# Allegro board 100ask_imx6ull_lcd底板.brd
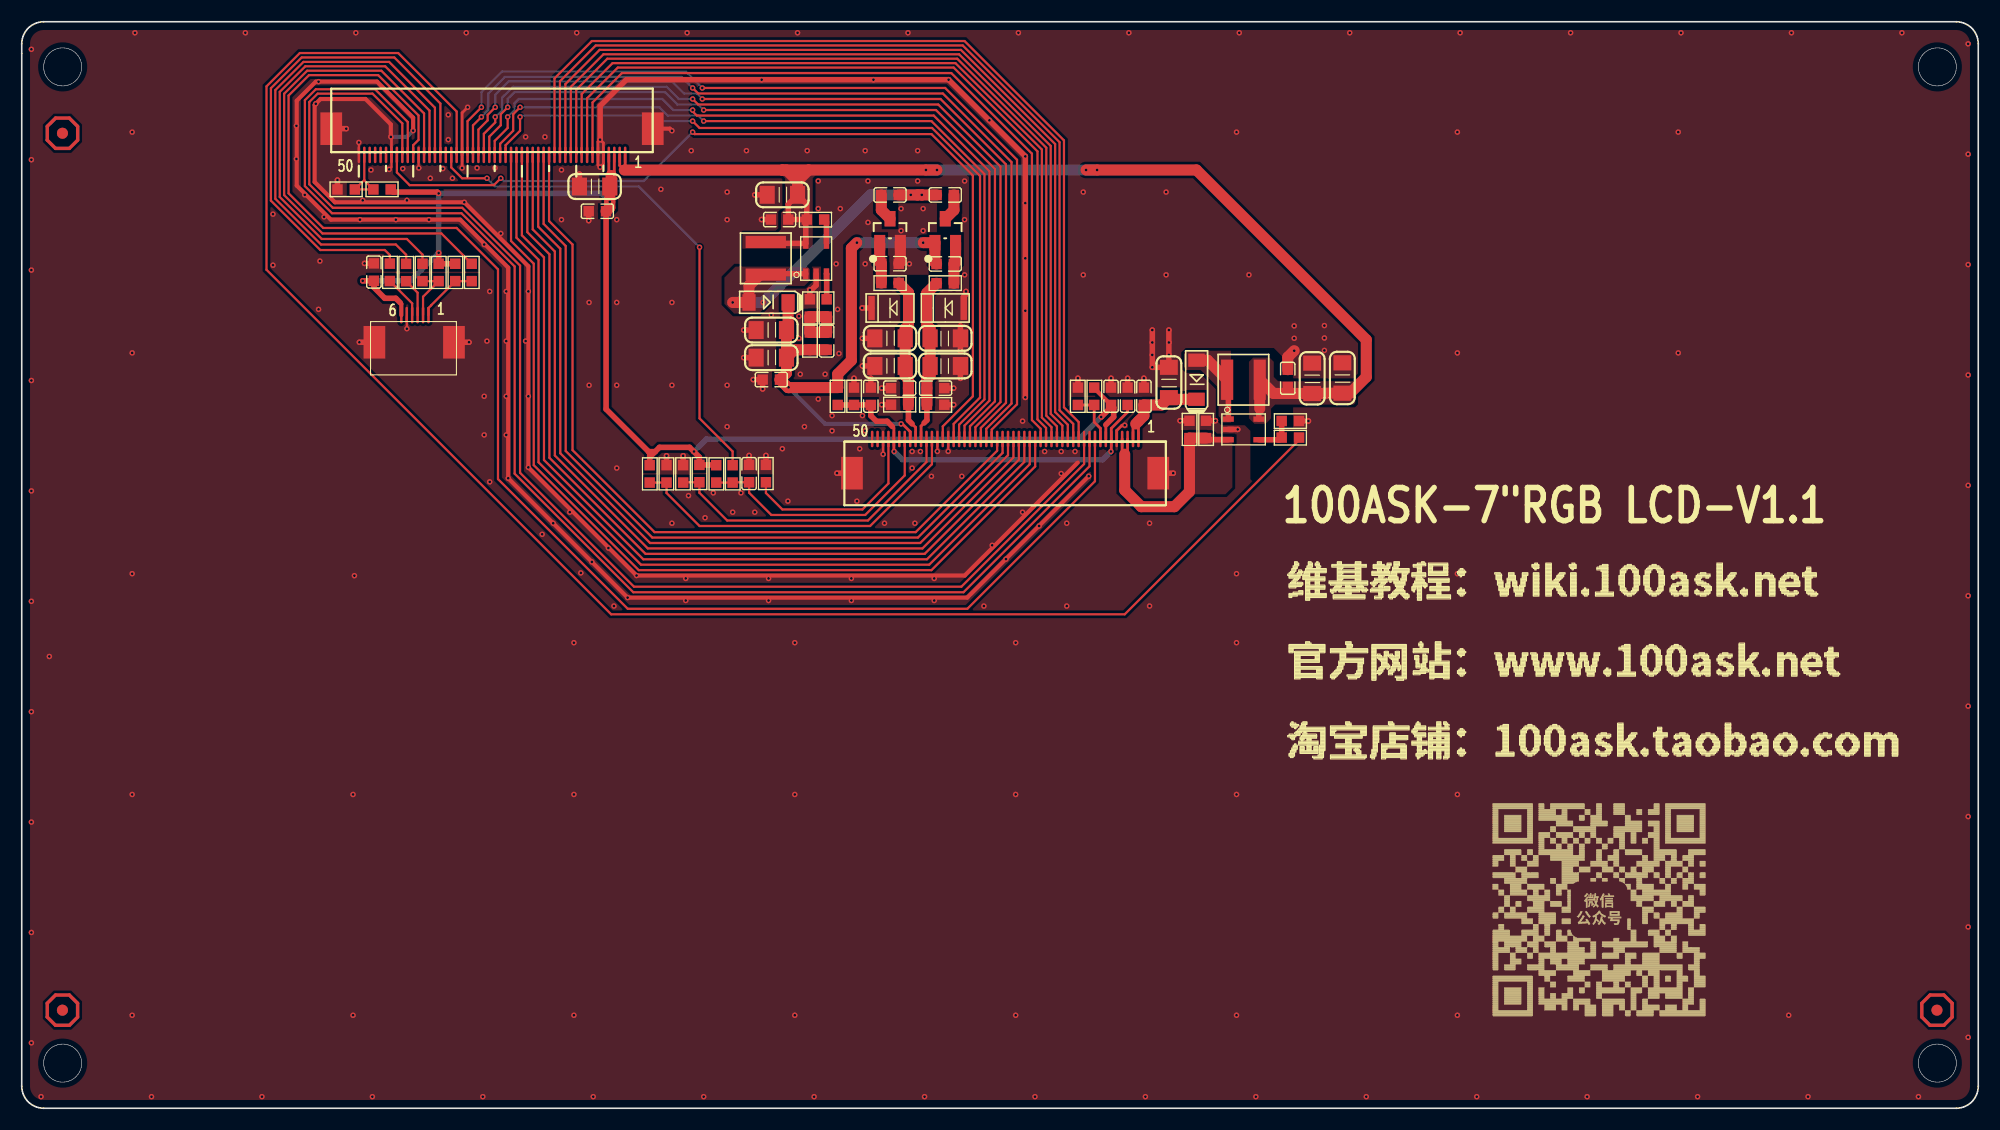
[diagram p0: board, top side]
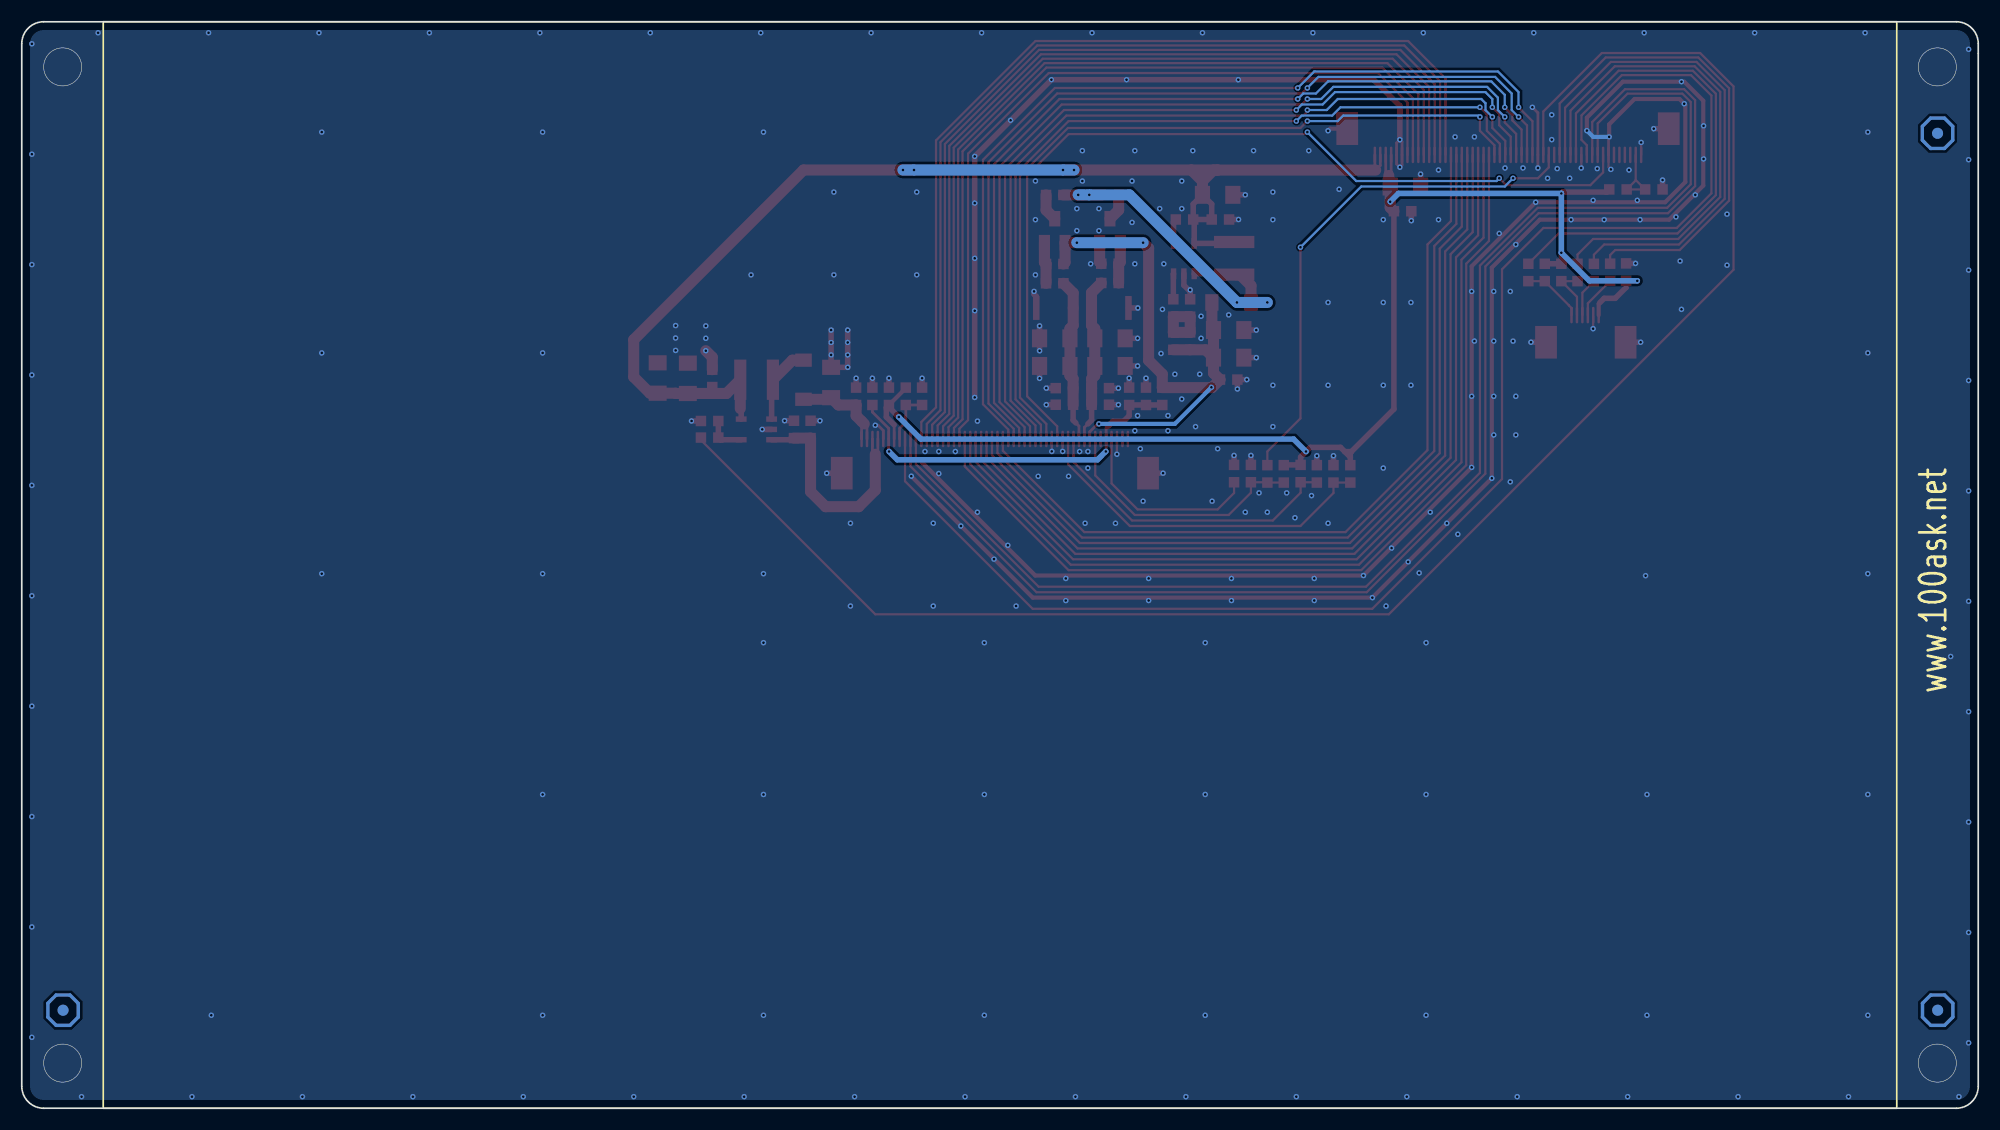
[diagram p1: board, bottom side, seen from below]

Outline 180 x 100 mm; copper layers: TOP, BOTTOM. Coordinates in mm from the lower left corner of the outline.
Outline path: circle c3.76,95.84 r1.75 ; circle c3.76,4.16 r1.75 ; circle c176.24,95.84 r1.75 ; circle c176.24,4.16 r1.75 ; 0,97.97 0,2.03 arc(0.6,0.6) 2.03,0 177.97,0 arc(179.4,0.6) 180,2.03 180,97.97 arc(179.4,99.4) 177.97,100 2.03,100 arc(0.6,99.4) 0,97.97

## Design rules (mm)
net group POWER: nets 3V3 VDDA VGH VGL VLED+

## Placement (name value [footprint] x y rotation side)
C1  NC/100nF/6/25V  [C0603]  84.96 77.71 0 top
C2  1uF/12/25V  [C1206]  84.96 70.86 0 top
C3  1uF/12/25V  [C1206]  84.96 68.32 0 top
C4  100nF/6/25V  [C0603]  84.07 66.28 180 top
C5  100nF/6/25V  [C0603]  84.96 84.06 0 top
C6  100nF/6/25V  [C0603]  79.88 84.06 180 top
C7  100nF/6/25V  [C0603]  79.88 77.73 180 top
C8  1uF/12/25V  [C1206]  79.88 70.86 180 top
C9  1uF/12/25V  [C1206]  79.88 68.32 180 top
C10  100nF/6/25V  [C0603]  80.77 66.28 0 top
C11  22pF/6/25V  [C0603]  74.05 70.61 90 top
C12  10uF/12/16V  [C1206]  68.96 69.08 180 top
C13  1uF/12/25V  [C1206]  68.96 71.62 180 top
C14  10uF/12/16V  [C1206]  69.98 84.07 180 top
C15  100nF/6/25V  [C0603]  69.72 81.8 180 top
C16  100nF/6/25V  [C0603]  101.74 65.53 90 top
C17  100nF/6/25V  [C0603]  78.12 65.53 90 top
C18  100nF/6/25V  [C0603]  66.92 58.41 270 top
C19  10uF/12/16V  [C1206]  118.72 67.18 90 top
C20  10uF/12/16V  [C1206]  121.5 67.21 90 top
C21  1uF/12/25V  [C1206]  105.54 66.8 90 top
C22  100nF/6/25V  [C0603]  52.96 82.56 180 top
C23  10uF/12/16V  [C1206]  52.71 84.83 180 top
C24  100nF/6/25V  [C0603]  103.24 65.53 270 top
C25  100nF/6/25V  [C0603]  68.96 67.06 180 top
C26  100nF/6/25V  [C0603]  100.22 65.53 90 top
C27  100nF/6/25V  [C0603]  32.4 76.96 90 top
C28  100nF/6/25V  [C0603]  116.47 67.18 90 top
D1  BAT54S/SOT  [SOT23]  84.96 80.77 0 top
D2  ZMM16V  [LL-34]  84.96 73.65 180 top
D3  BAT54S/SOT  [SOT23]  79.88 80.77 0 top
D4  ZMM7V5  [LL-34]  79.88 73.65 180 top
D5  IN5819  [SOD123]  68.71 74.16 180 top
D6  IN5819  [SOD123]  108.08 67.05 90 top
J1  LCD_FPC_50P  [FPC50_0A5_SM_H1]  55.51 87.75 0 top
J2  FPC50_LCD_MOD  [FPC50_0A5_SM_H]  90.47 61.36 0 top
J3  TP_FPC_6P  [FPC6_0A5_SM_H]  36.11 74.02 180 top
L1  10uH/4X4X2.0  [IND_4020]  68.45 78.23 270 top
L2  4.7uH/4X4X2.0  [IND_4020]  112.4 67.05 180 top
NOREF  -  [unnamed]  3.75 9.03 0 top
NOREF#2  -  [unnamed]  3.75 89.74 0 top
NOREF#3  -  [unnamed]  176.2 9.03 0 top
NOREF#4  -  [unnamed]  176.2 9.02 180 bottom
NOREF#5  -  [unnamed]  3.73 9.02 180 bottom
NOREF#6  -  [unnamed]  3.75 89.73 180 bottom
R1  1.4K/6/1%  [R0603]  84.96 75.93 0 top
R2  NC_4.7K/6/1%  [R0603]  84.07 64.75 180 top
R3  NC  [R0603]  98.67 65.53 270 top
R4  4.7K/6/1%  [R0603]  97.17 65.53 90 top
R5  2.2K/6/1%  [R0603]  79.88 75.95 180 top
R6  NC_4.7K/6/1%  [R0603]  80.77 64.75 0 top
R7  0R  [R0603]  57.77 58.39 270 top
R8  0R  [R0603]  62.34 58.41 270 top
R9  10K  [R0603]  63.89 58.39 270 top
R10  0R  [R0603]  65.4 58.39 270 top
R11  100K/6/1%  [R0603]  72.5 70.61 270 top
R12  10K/6/1%  [R0603]  73.03 81.8 180 top
R13  100K/6/1%  [R0603]  74.05 73.65 90 top
R14  13K/6/1%  [R0603]  72.5 73.65 270 top
R15  10K  [R0603]  75.07 65.53 90 top
R16  NC  [R0603]  59.32 58.39 90 top
R17  NC  [R0603]  60.85 58.39 90 top
R18  4.7K  [R0603]  76.57 65.53 270 top
R19  4.7K  [R0603]  68.47 58.41 90 top
R20  4.7K/6/1%  [R0603]  38.36 76.92 270 top
R21  1K/6/5%  [R0603]  33.15 84.56 0 top
R22  4.7K/6/1%  [R0603]  39.88 76.92 270 top
R23  20R/6/1%  [R0603]  41.4 76.92 270 top
R24  20R/6/1%  [R0603]  36.87 76.92 270 top
R25  20R/6/1%  [R0603]  35.36 76.92 270 top
R26  20R/6/1%  [R0603]  33.87 76.93 270 top
R27  10K/6/1%  [R0603]  29.85 84.56 0 top
R28  10K/6/1%  [R0603]  116.71 61.73 180 top
R29  47K/6/1%  [R0603]  116.71 63.25 180 top
R30  3R/6/1%  [R0603]  108.95 62.48 270 top
R31  3R/6/1%  [R0603]  107.43 62.48 270 top
U1  MP1541  [SOT23-5]  73.08 78.2 0 top
U3  MP3302  [SOT23-5]  112.41 62.48 270 top

## Library data of the parts
C1 C4-C7 C10 C11 C15-C18 C22 C24-C28 = CAP NP
C2 C3 C8 C9 C12-C14 C19-C21 C23 = CERAMIC CAPACITOR: Tolerance: #TOL; User Part Number: HAMP
D1 = BAT54S/SOT_2: User Part Number: *; Tolerance: *
D2 = ZHCS1000/SOT_3
D3 = BAT54S/SOT_1: User Part Number: *; Tolerance: *
D4 = ZHCS1000/SOT_2
D5 D6 = General Diode
J1 = LCD_FPC_3
J2 = FPC50_LCD_MOD_2
J3 = FPC_1.5MM-6P
L1 L2 = Inductor
R1-R20 R22-R31 = R1_0805
R21 = R1 0805
U1 = MP1541
U3 = MP3302

## Footprints (pads in the part's own frame, mm; a bottom-side part is the same pattern mirrored in y, then rotated)
C0603
  rect 0.965x0.965 smd: 1(-0.8,0) 2(0.8,0)
C1206
  rect 1.397x1.651 smd: 1(-1.397,0) 2(1.397,0)
FPC6_0A5_SM_H
  oval 0.229x1.524 smd: 1(-1.315,1.02) 2(-0.815,1.02) 3(-0.315,1.02) 4(0.185,1.02) 5(0.685,1.02) 6(1.185,1.02)
  rect 2x3 smd: 7(3.66,3.52) 8(-3.66,3.52)
FPC50_0A5_SM_H
  oval 0.229x1.524 smd: 1(12.267,0.242) 2(11.767,0.242) 3(11.267,0.242) 4(10.767,0.242) 5(10.267,0.242) 6(9.767,0.242) 7(9.267,0.242) 8(8.767,0.242) 9(8.267,0.242) 10(7.767,0.242) 11(7.267,0.242) 12(6.767,0.242) 13(6.267,0.242) 14(5.767,0.242) 15(5.267,0.242) 16(4.767,0.242) 17(4.267,0.242) 18(3.767,0.242) 19(3.267,0.242) 20(2.767,0.242) 21(2.267,0.242) 22(1.767,0.242) 23(1.267,0.242) 24(0.767,0.242) 25(0.267,0.242) 26(-0.233,0.242) 27(-0.733,0.242) 28(-1.233,0.242) 29(-1.733,0.242) 30(-2.233,0.242) 31(-2.733,0.242) 32(-3.233,0.242) 33(-3.733,0.242) 34(-4.233,0.242) 35(-4.733,0.242) 36(-5.233,0.242) 37(-5.733,0.242) 38(-6.233,0.242) 39(-6.733,0.242) 40(-7.233,0.242) 41(-7.733,0.242) 42(-8.233,0.242) 43(-8.733,0.242) 44(-9.233,0.242) 45(-9.733,0.242) 46(-10.233,0.242) 47(-10.733,0.242) 48(-11.233,0.242) 49(-11.733,0.242) 50(-12.233,0.242)
  rect 2x3 smd: 51(14.09,-2.908) 52(-14.09,-2.908)
FPC50_0A5_SM_H1
  oval 0.229x1.524 smd: 1(0,0) 2(-0.5,0) 3(-1,0) 4(-1.5,0) 5(-2,0) 6(-2.5,0) 7(-3,0) 8(-3.5,0) 9(-4,0) 10(-4.5,0) 11(-5,0) 12(-5.5,0) 13(-6,0) 14(-6.5,0) 15(-7,0) 16(-7.5,0) 17(-8,0) 18(-8.5,0) 19(-9,0) 20(-9.5,0) 21(-10,0) 22(-10.5,0) 23(-11,0) 24(-11.5,0) 25(-12,0) 26(-12.5,0) 27(-13,0) 28(-13.5,0) 29(-14,0) 30(-14.5,0) 31(-15,0) 32(-15.5,0) 33(-16,0) 34(-16.5,0) 35(-17,0) 36(-17.5,0) 37(-18,0) 38(-18.5,0) 39(-19,0) 40(-19.5,0) 41(-20,0) 42(-20.5,0) 43(-21,0) 44(-21.5,0) 45(-22,0) 46(-22.5,0) 47(-23,0) 48(-23.5,0) 49(-24,0) 50(-24.5,0)
  rect 2x3 smd: 51(-27.04,2.413) 52(2.54,2.413)
IND_4020
  rect 1.118x3.708 smd: 1(-1.5,0) 2(1.5,0)
LL-34
  rect 0.6x2.2 smd: 1(-1.7,0) 2(1.7,0)
R0603
  rect 0.965x0.965 smd: 1(-0.8,0) 2(0.8,0)
SOD123
  rect 1.219x1.524 smd: 1(1.8,0) 2(-1.8,0)
SOT23
  rect 1.016x1.422 smd: 1(-0.95,-1.1) 2(0.95,-1.1) 3(0,1.1)
SOT23-5
  rect 0.5x1 smd: 1(-0.95,-1.4) 2(0,-1.4) 3(0.95,-1.4) 4(0.95,1.4) 5(-0.95,1.4)
unnamed
  round 1.016 smd: 1(0,0)

## Nets
3V3: C22.1 C23.1 C26.1 C27.1 J1.3(3V3) J1.4(3V3_1) J2.7(VDD) J3.6(VCC) R3.1 R7.1 R8.1 R9.1 R20.1 R21.2 R22.1
5V: C14.1 C15.1 C19.1 C20.1 C28.1 J1.1(5V) J1.2(5V_1) L1.1 L2.1 R12.2 U1.5(VIN) U3.5(VIN)
GND_POWER: C2.2 C3.2 C4.1 C7.1 C8.2 C9.2 C10.1 C12.2 C13.2 C14.2 C15.2 C16.2 C17.2 C18.1 C19.2 C20.2 C21.2 C22.2 C23.2 C24.1 C25.2 C26.2 C27.2 C28.2 D2.1(CATHODE) D3.2 D4.2(ANODE) J1.5(GND0) J1.6(GND1) J1.31(GND2) J1.39(GND3) J1.44(GND4) J1.50(GND5) J1.51(SH1) J1.52(SH2) J2.5(GND_1) J2.36(GND_2) J2.38(GND_3) J2.48(GND_4) J2.51(SH1) J2.52(SH2) J3.5(GND) J3.7(SH1) J3.8(SH2) R2.1 R4.2 R6.1 R14.1 R16.2 R17.2 R18.1 R19.2 R27.1 R29.1 R30.1 R31.1 U1.2(GND) U3.2(GND)
VDDA: C1.1 C11.1 C12.1 C13.1 C25.1 D1.1 D5.2 J2.43(VDDA) R11.2 R15.2
B0: J1.7(B0) J2.19(B0)
B1: J1.8(B1) J2.18(B1)
B2: J1.9(B2) J2.17(B2)
B3: J1.10(B3) J2.16(B3)
B4: J1.11(B4) J2.15(B4)
B5: J1.12(B5) J2.14(B5)
B6: J1.13(B6) J2.13(B6)
B7: J1.14(B7) J2.12(B7)
BL_CN: J1.32(BL_CN) R28.1
DE: J1.40(DEN) J2.9(DE)
G0: J1.15(G0) J2.27(G0)
G1: J1.16(G1) J2.26(G1)
G2: J1.17(G2) J2.25(G2)
G3: J1.18(G3) J2.24(G3)
G4: J1.19(G4) J2.23(G4)
G5: J1.20(G5) J2.22(G5)
G6: J1.21(G6) J2.21(G6)
G7: J1.22(G7) J2.20(G7)
HS: J1.42(HSYNC) J2.11(HSYNC)
LCD_ID: J1.49(LR/ADC_LCD_ID) R21.1 R27.2
PCLK: J1.43(PCLK) J2.37(CLK)
R0: J1.23(R0) J2.35(R0)
R1: J1.24(R1) J2.34(R1)
R2: J1.25(R2) J2.33(R2)
R3: J1.26(R3) J2.32(R3)
R4: J1.27(R4) J2.31(R4)
R5: J1.28(R5) J2.30(R5)
R6: J1.29(R6) J2.29(R6)
R7: J1.30(R7) J2.28(R7)
RST: J1.33(RESET) R10.1
TP_INT: J1.35(TP_INTN) R26.1
TP_RST: J1.36(TP_RESET) R25.1
TP_SCL: J1.37(TP_SCL) R24.1
TP_SDA: J1.38(TP_SDA) R23.1
VGH: C2.1 C3.1 C4.2 D2.2(ANODE) J2.41(VGH) R1.1 R2.2
VGL: C8.1 C9.1 C10.2 D4.1(CATHODE) J2.42(VGL) R5.1 R6.2
VLED+: C21.1 C24.2 D6.2 J2.1(LED+_1) J2.2(LED+_2)
VLED-: J2.3(LED-_1) J2.4(LED-_2) R30.2 R31.2 U3.3(FB)
VS: J1.41(VSYNC) J2.10(VSYNC)
N16662620: D6.1 L2.2 U3.1(SW)
N16662628: J2.47(DITHER) R19.1
N16662982: R28.2 R29.2 U3.4(EN)
N16663078: C16.1 C17.1 J2.6(VCOM1) J2.46(VCOM2) R15.1 R18.2
N16663526: J3.1(SDA) R22.2 R23.2
N16663546: J3.2(SCL) R20.2 R24.2
N16663566: J3.3(RST) R25.2
N16663598: J3.4(INT) R26.2
N16663626: J2.8(MODE) R3.2 R4.1
N16663658: J2.40(UPDN) R8.2 R17.1
N16663662: J2.39(SHLR) R7.2 R16.1
N16663942: C18.2 J2.44(RESET) R9.2 R10.2
N16663986: C5.1 C6.1 D5.1 L1.2 U1.1(SW)
N16664260: C11.2 R11.1 R13.1 R14.2
N16664552: R13.2 U1.3(FB)
N16664760: C6.2 D3.3
N16664764: C5.2 D1.3
N16664892: C1.2 D1.2 R1.2
N16665094: C7.2 D3.1 R5.2
N16692155: R12.1 U1.4(\\S\H\D\N)

Pads without a net: J1 34 45 46 47 48; J2 45 49 50; NOREF 1; NOREF#2 1; NOREF#3 1; NOREF#4 1; NOREF#5 1; NOREF#6 1

## Via types
v1: diameter 0.508, hole 0.254, TOP to BOTTOM, 352 vias

## Routing (per net, layer and track width the routed paths; a pad name or vN(x,y) marks a point on that pad's centre or on a via; arc(x,y) is an arc through that point)
3V3: length 131.8
  TOP w0.254: 54.23,84.96 54.51,85.24 54.51,86.13 ; C23.1 54.01,84.92 54.01,86.19 ; 54.01,86.19 J1.4 ; 54.01,86.19 54.29,85.91 54.51,86.13 ; J2.7 99.74,62.9 ; 54.51,86.13 J1.3
  TOP w0.381: R3.1 98.67,66.28 C26.1 ; 34.82,74.14 34.92,74.04 J3.6
  TOP w0.508: 34.82,74.14 34.42,74.54 33.4,74.54 32.4,75.55 C27.1 v1(31.37,76.16) ; 99.74,62.9 100.46,63.62 100.46,64.49 C26.1 100.22,64.52 v1(99.31,63.62) ; 57.67,60.43 58.28,60.43 ; 57.67,60.43 53.76,64.35 C22.1 ; 57.67,60.43 57.77,60.33 57.77,59.93 ; 58.28,60.43 58.67,60.83 61.44,60.83 61.84,60.43 ; 58.28,60.43 57.77,59.93 ; R9.1 63.87,59.22 R8.1 62.34,59.93 61.84,60.43 ; R21.2 34.19,84.32 38.23,84.32 v1(38.36,84.19) ; 57.77,59.93 R7.1 ; v1(61.85,60.45) 61.84,60.43 ; v1(38.36,78.74) R20.1 R22.1
  TOP w1.016: C22.1 54.1,82.9 v1(54.1,83.43) C23.1 54.23,84.96 54.23,85.85
  BOTTOM w0.508: v1(54.1,83.43) 53.34,84.2 38.36,84.2 v1(38.36,84.19) v1(38.36,78.74) 35.78,76.16 v1(31.37,76.16) ; v1(61.85,60.45) 62.99,61.59 97.28,61.59 v1(99.31,63.62)
5V: length 117.8
  TOP w0.254: 55.25,86.54 55.01,86.77 J1.2 ; 55.25,86.54 55.51,86.8 J1.1 ; 55.25,86.54 55.44,86.35
  TOP w0.508: U3.5 113.81,66.97 L2.1 ; R12.2 C15.1 70.52,83.22 C14.1 72.22,83.22 R12.2 ; R12.2 72.13,81.7 U1.5 68.58,79.6 L1.1
  TOP w1.016: v1(84.2,86.35) v1(83.19,86.35) 72.4,86.35 ; 69.98,86.35 69.99,86.35 72.4,86.35 ; 69.98,86.35 55.44,86.35 ; 69.98,86.35 70.36,86.35 71.37,85.33 ; 72.4,86.35 71.37,85.33 ; 71.37,85.33 C14.1 ; 113.9,64.4 L2.1 115.16,65.79 C19.1 119.82,65.79 119.84,65.81 C20.1 122.2,65.81 123.7,67.3 123.7,70.73 108.08,86.35 v1(98.93,86.35) v1(97.92,86.35)
  BOTTOM w1.016: v1(83.19,86.35) v1(84.2,86.35) v1(97.92,86.35) v1(98.93,86.35)
GND_POWER: length 394.2
  TOP w0.203: v1(31.01,88.89) J1.50 ; v1(85.24,60.46) J2.36 ; J1.44 34.01,86.62 v1(33.8,86.41) ; v1(84.24,60.46) J2.38 ; J1.39 36.51,86.55 ; v1(35.43,71.75) 35.43,72.89 ; v1(79.25,60.19) 79.25,61.34
  TOP w0.254: J2.5 100.74,62.38 101.22,62.86 v1(101.47,62.86) ; J1.44 34.01,89.35 ; v1(41.02,92.13) 40.51,91.62 J1.31 v1(40.51,86.54) ; J1.5 53.51,86.91 v1(53.21,86.61) 53.01,86.81 J1.6 53.01,88.95 v1(53.21,89.15) 53.51,88.85 J1.5
  TOP w0.381: v1(36.01,89.98) 36.01,91.17 32.7,94.48 v1(27.31,94.48) 27.05,94.48 25.3,92.73 25.3,84.92 28.44,81.78 40.34,81.78 44.75,77.37 v1(44.75,57.98) v1(55.74,47) 86.98,47 v1(98.16,58.17) ; 97.16,59.43 86.75,49.03 v1(56.56,49.03) v1(46.61,58.98) v1(46.61,65.53) v1(46.61,75.18) 46.61,77.49 v1(40.72,83.38) 28.81,83.38 26.95,85.25 26.95,92.35 v1(27.05,92.45) 27.49,92.89 31.62,92.89 33.96,90.55 v1(33.96,89.4) 34.01,89.35 ; 36.51,86.55 v1(36.53,86.54) ; v1(59.82,89.97) 59.63,90.16 J1.52
  TOP w0.508: v1(104.01,71.62) v1(104.01,70.48) v1(104.01,69.34) v1(104.01,68.19) C21.2 v1(105.54,69.34) v1(105.54,70.48) v1(105.54,71.62) ; D2.1 86.66,74.72 86.87,74.92 v1(86.87,75.18) ; v1(67.3,67.06) C25.2 v1(68.16,66.2) ; J2.51 v1(105.94,58.45) ; v1(92.33,65.43) v1(92.33,87.6) v1(85.27,94.67) v1(78.36,94.67) v1(68.07,94.67) 55.63,94.67 53.21,92.25 v1(53.21,89.15) ; C3.2 v1(86.36,67.18) ; D4.2 v1(77.32,73.65) ; C9.2 v1(77.34,68.32) ; J3.8 v1(41.15,70.5) ; C10.1 v1(79.11,66.28) ; R17.2 v1(60.85,60.05) ; U1.2 73.08,75.74 72.5,75.17 ; R27.1 v1(29.04,85.43) ; C26.2 v1(100.22,67.19) ; v1(86.36,69.72) C2.2 v1(86.36,72) ; J1.51 v1(29.85,90.16) ; C24.1 v1(103.24,67.19) ; R30.1 v1(109.82,63.28) ; J3.7 v1(31.06,70.5) ; R2.1 v1(85.74,64.75) ; R31.1 v1(106.57,63.28) ; C13.2 v1(66.42,71.62) ; C23.2 v1(51.31,85.97) ; C8.2 v1(77.34,70.86) ; C14.2 v1(67.44,84.07) ; R4.2 v1(97.17,67.19) ; C22.2 v1(52.16,81.69) ; C18.1 v1(66.92,60.08) ; C16.2 v1(101.74,67.19) ; C12.2 v1(66.42,69.08) ; R18.1 v1(76.57,67.19) ; C4.1 v1(85.74,66.28) ; C27.2 v1(31.53,77.76) ; C15.2 v1(68.06,81.8) ; R14.1 72.5,75.17 ; 72.5,75.17 v1(72.5,75.32) ; C17.2 v1(78.12,67.19) ; R6.1 v1(79.11,64.75) ; R29.1 v1(118.38,63.25) ; R19.2 v1(68.47,60.08) ; U3.2 v1(111.87,62.48) ; J2.52 v1(75,58.45) ; R16.2 v1(59.32,60.05)
  TOP w1.016: v1(117.07,69.72) 116.47,69.13 C28.2 ; D3.2 80.83,77.88 C7.1
  BOTTOM w0.381: v1(33.96,89.4) 35.43,89.4 v1(36.01,89.98)
  vias: v1(0.89,97.46) v1(0.89,87.3) v1(0.89,77.14) v1(0.89,66.98) v1(0.89,56.82) v1(0.89,46.66) v1(0.89,36.5) v1(0.89,26.34) v1(0.89,16.18) v1(0.89,6.02) v1(1.78,1.07) v1(2.54,41.58) v1(10.16,89.84) v1(10.16,69.52) v1(10.16,49.2) v1(10.16,28.88) v1(10.16,8.56) v1(10.41,98.98) v1(11.94,1.07) v1(20.57,98.98) v1(22.1,1.07) v1(23.11,82.29) v1(23.11,77.59) v1(25.27,90.42) v1(25.27,87.37) v1(26.04,84.07) v1(27.31,73.53) v1(27.43,77.97) v1(27.81,82.04) v1(30.48,28.88) v1(30.48,8.56) v1(30.61,49.02) v1(30.73,98.98) v1(31.12,81.78) v1(31.37,83.56) v1(32.13,86.35) v1(32.26,1.07) v1(34.42,81.78) v1(35.05,86.48) v1(35.43,83.56) v1(37.47,81.78) v1(37.59,85.59) v1(38.74,86.48) v1(39.24,91.43) v1(39.24,89.15) v1(39.62,85.59) v1(40.89,98.98) v1(41.89,86.54) v1(42.42,1.07) v1(42.55,79.5) v1(42.55,65.53) v1(42.55,61.97) v1(42.8,70.61) v1(43.05,75.18) v1(43.05,57.65) v1(43.54,86.54) v1(44.07,80.51) v1(44.58,75.18) v1(44.58,70.61) v1(44.58,65.53) v1(44.58,61.97) v1(46.36,89.4) v1(46.36,70.61) v1(47.88,52.83) v1(48.13,89.4) v1(48.9,53.84) v1(49.66,86.35) v1(49.66,81.78) v1(50.42,54.86) v1(50.8,42.85) v1(50.8,28.88) v1(50.8,8.56) v1(51.05,98.98) v1(51.44,49.27) v1(52.2,74.16) v1(52.2,66.54) v1(52.45,50.29) v1(52.58,1.07) v1(53.98,51.56) v1(54.48,46.22) v1(54.74,81.78) v1(54.74,74.16) v1(54.74,66.54) v1(54.74,58.92) v1(58.8,84.58) v1(59.82,74.16) v1(59.82,66.54) v1(59.82,53.84) v1(61.09,48.76) v1(61.09,46.73) v1(61.21,98.98) v1(61.34,56.38) v1(61.6,88.13) v1(62.74,1.07) v1(62.87,54.35) v1(63.63,56.64) v1(64.9,84.32) v1(64.9,81.78) v1(64.9,66.54) v1(64.9,62.73) v1(65.41,54.86) v1(66.17,56.64) v1(66.68,88.13) v1(67.44,54.86) v1(68.71,48.76) v1(68.71,46.73) v1(68.96,73.02) v1(69.98,60.7) v1(70.49,55.87) v1(71.12,42.85) v1(71.12,28.88) v1(71.12,8.56) v1(71.37,98.98) v1(71.5,72.89) v1(71.5,70.86) v1(71.63,67.56) v1(72.01,62.73) v1(72.26,88.13) v1(72.9,1.07) v1(73.28,85.34) v1(73.28,82.8) v1(73.28,65.27) v1(73.91,67.56) v1(74.55,63.75) v1(74.55,62.35) v1(74.93,77.72) v1(75.06,73.53) v1(75.18,69.46) v1(75.31,82.8) v1(76.33,48.76) v1(76.33,46.73) v1(76.84,55.87) v1(77.09,60.7) v1(77.34,63.75) v1(77.6,88.13) v1(77.6,77.72) v1(77.6,62.35) v1(77.85,85.34) v1(77.85,81.53) v1(79.38,53.84) v1(80.9,82.8) v1(80.9,80.77) v1(81.53,98.98) v1(81.66,77.72) v1(81.92,60.45) v1(81.92,58.92) v1(82.17,53.84) v1(82.42,88.13) v1(82.42,85.34) v1(82.68,60.45) v1(82.93,82.8) v1(82.93,80.77) v1(83.06,1.07) v1(83.69,58.16) v1(83.95,48.76) v1(83.95,46.73) v1(86.49,58.16) v1(86.74,85.34) v1(86.74,81.78) v1(86.74,76.7) v1(88.52,46.22) v1(89.03,90.93) v1(89.28,51.81) v1(90.55,50.54) v1(91.44,42.85) v1(91.44,28.88) v1(91.44,8.56) v1(91.69,98.98) v1(92.08,63.24) v1(92.08,54.86) v1(92.33,83.31) v1(92.33,78.23) v1(92.33,73.4) v1(93.22,1.07) v1(93.6,53.59) v1(94.11,60.45) v1(95.63,60.45) v1(95.63,58.41) v1(96.14,53.84) v1(96.14,46.22) v1(96.9,60.45) v1(97.66,84.32) v1(97.66,76.7) v1(101.85,98.98) v1(103.38,1.07) v1(103.76,53.84) v1(103.76,46.22) v1(105.28,84.32) v1(105.28,76.7) v1(111.76,89.84) v1(111.76,49.2) v1(111.76,42.85) v1(111.76,28.88) v1(111.76,8.56) v1(112.01,98.98) v1(112.9,76.7) v1(113.54,1.07) v1(117.07,72.01) v1(117.07,70.87) v1(119.84,72.03) v1(119.84,70.89) v1(119.84,69.75) v1(122.17,98.98) v1(123.7,1.07) v1(132.08,89.84) v1(132.08,69.52) v1(132.08,49.2) v1(132.08,28.88) v1(132.08,8.56) v1(132.33,98.98) v1(133.86,1.07) v1(142.49,98.98) v1(144.02,1.07) v1(152.4,89.84) v1(152.4,69.52) v1(152.4,49.2) v1(152.65,98.98) v1(154.18,1.07) v1(162.56,8.56) v1(162.81,98.98) v1(164.34,1.07) v1(172.97,98.98) v1(174.5,1.07) v1(179.07,97.97) v1(179.07,87.81) v1(179.07,77.65) v1(179.07,67.49) v1(179.07,57.33) v1(179.07,47.17) v1(179.07,37.01) v1(179.07,26.85) v1(179.07,16.69) v1(179.07,6.53)
VDDA: length 53.9
  TOP w0.254: v1(80.9,62.99) 81.02,62.99 81.74,62.27 J2.43
  TOP w1.016: 70.57,66.33 v1(70.55,66.35) ; 70.57,66.33 70.5,66.33 C25.1 70.36,67.66 C12.1 ; 70.57,66.33 R15.2 75.07,67.57 76.33,68.83 76.33,79.16 v1(76.84,79.67) ; C12.1 71.08,69.81 R11.2 C11.1 ; C12.1 C13.1 70.51,71.77 D5.2 ; v1(82.93,79.67) D1.1 84.01,77.86 C1.1
  BOTTOM w0.381: v1(70.55,66.35) 73.91,62.99 v1(80.9,62.99)
  BOTTOM w1.016: v1(82.93,79.67) v1(76.84,79.67)
B0: length 76
  TOP w0.203: J2.19 93.74,62.54 92.94,63.34 92.94,87.86 85.52,95.28 55.22,95.28 52.51,92.57 J1.7
B1: length 77.8
  TOP w0.203: J1.8 52.01,92.96 54.84,95.78 85.73,95.78 93.45,88.07 93.45,63.4 94.24,62.61 J2.18
B2: length 79.4
  TOP w0.203: J1.9 51.51,93.35 54.36,96.19 85.9,96.19 93.85,88.24 93.85,63.57 94.74,62.69 J2.17
B3: length 81
  TOP w0.203: J1.10 51.01,93.74 53.87,96.6 86.07,96.6 94.26,88.4 94.26,63.74 95.24,62.76 J2.16
B4: length 82.6
  TOP w0.203: J2.15 95.74,62.84 94.67,63.91 94.67,88.57 86.24,97 53.52,97 50.51,94 J1.11
B5: length 84.1
  TOP w0.203: J2.14 96.24,62.91 95.07,64.08 95.07,88.74 86.4,97.41 53.16,97.41 50.01,94.26 J1.12
B6: length 85.6
  TOP w0.203: J1.13 49.51,94.52 52.81,97.82 86.57,97.82 95.48,88.91 95.48,64.25 96.74,62.99 J2.13
B7: length 87.2
  TOP w0.203: J1.14 49.01,94.78 52.45,98.22 86.74,98.22 95.88,89.08 95.88,64.51 97.24,63.16 J2.12
BL_CN: length 156.9
  TOP w0.203: J1.32 40.01,91.74 34.63,97.12 25.58,97.12 22.52,94.05 22.52,77.17 54.23,45.46 101.47,45.46 117.51,61.5 R28.1
DE: length 137.2
  TOP w0.203: J1.40 36.01,88.64 36.5,89.13 36.5,91.37 32.79,95.09 26.43,95.09 24.55,93.21 24.55,84.21 27.74,81.02 40.01,81.02 43.81,77.21 43.81,57.91 55.75,45.97 87,45.97 98.74,57.71 J2.9
G0: length 74.4
  TOP w0.203: J2.27 89.74,60.52 82.24,53.02 58.22,53.02 50.67,60.57 50.67,79.5 48.51,81.66 J1.15
G1: length 76.1
  TOP w0.203: J2.26 90.24,60.31 82.45,52.52 58.01,52.52 50.05,60.49 50.05,79.36 48.01,81.39 J1.16
G2: length 77.8
  TOP w0.203: J1.17 47.51,81.14 49.55,79.11 49.55,60.28 57.8,52.02 82.66,52.02 90.74,60.1 J2.25
G3: length 79.4
  TOP w0.203: J2.24 91.24,59.9 82.86,51.52 57.6,51.52 49.05,60.08 49.05,78.86 47.01,80.89 J1.18
G4: length 81.1
  TOP w0.203: J1.19 46.51,80.63 48.55,78.6 48.55,59.87 57.39,51.02 83.07,51.02 91.74,59.69 J2.23
G5: length 82.7
  TOP w0.203: J2.22 92.24,59.48 83.28,50.52 57.18,50.52 48.05,59.66 48.05,78.31 46.01,80.35 J1.20
G6: length 84.4
  TOP w0.203: J1.21 45.51,80.13 47.55,78.09 47.55,59.46 56.98,50.02 83.49,50.02 92.74,59.28 J2.21
G7: length 86
  TOP w0.203: J1.22 45.01,79.82 47.1,77.73 47.1,59.19 56.77,49.52 83.69,49.52 93.24,59.07 J2.20
HS: length 125.3
  TOP w0.203: J1.42 35.01,90.64 32.27,93.38 27.23,93.38 26.45,92.61 26.45,85.04 28.62,82.88 40.52,82.88 45.85,77.55 45.85,58.48 56.33,48 86.44,48 97.74,59.29 J2.11
LCD_ID: length 6.5
  TOP w0.203: 31.51,85.43 R27.2 R21.1 31.51,85.4 31.51,85.43 ; 31.51,85.43 J1.49
PCLK: length 84.4
  TOP w0.203: v1(44.07,85.59) 43.43,84.96 35.69,84.96 34.51,86.13 J1.43 ; v1(61.72,89.84) 61.91,89.66 83.69,89.66 87.5,85.85 87.5,65.53 84.74,62.76 J2.37
  BOTTOM w0.203: v1(61.72,89.84) 57.22,85.34 44.32,85.34 v1(44.07,85.59)
R0: length 73.9
  TOP w0.203: J2.35 85.74,62.99 88.16,65.41 88.16,85.81 83.75,90.22 62.36,90.22 v1(61.72,90.86) ; v1(45.85,91.24) 45.85,89.97 44.51,88.63 J1.23
  BOTTOM w0.203: v1(45.85,91.24) 45.97,91.36 58.42,91.36 58.93,90.86 v1(61.72,90.86)
R1: length 75.8
  TOP w0.203: J1.24 44.01,88.77 45.21,89.97 45.21,91.49 v1(45.85,92.13) ; J2.34 86.24,62.91 88.57,65.25 88.57,85.98 83.69,90.86 v1(62.74,90.86)
  BOTTOM w0.203: v1(45.85,92.13) 58.67,92.13 59.44,91.36 62.23,91.36 v1(62.74,90.86)
R2: length 77.8
  TOP w0.203: v1(44.7,91.24) 44.7,90.22 43.51,89.03 J1.25 ; J2.33 86.74,62.84 89.03,65.13 89.03,86.24 83.9,91.36 62.1,91.36 61.72,91.75 v1(61.72,91.87)
  BOTTOM w0.203: v1(61.72,91.87) 59.94,91.87 58.93,92.89 45.72,92.89 45.34,92.51 45.34,91.87 v1(44.7,91.24)
R3: length 79.7
  TOP w0.203: v1(44.7,92.13) 44.07,91.49 44.07,90.48 43.01,89.42 J1.26 ; J2.32 87.24,62.76 89.54,65.06 89.54,86.45 84.11,91.87 v1(62.74,91.87)
  BOTTOM w0.203: v1(62.74,91.87) 62.23,92.38 60.33,92.38 59.18,93.52 45.34,93.52 44.7,92.89 v1(44.7,92.13)
R4: length 81.3
  TOP w0.203: v1(61.72,92.89) 62.23,92.38 84.32,92.38 90.04,86.66 90.04,64.99 87.74,62.69 J2.31 ; v1(43.56,91.24) 43.56,90.73 42.51,89.68 J1.27
  BOTTOM w0.203: v1(61.72,92.89) 60.45,92.89 59.33,94.01 45.19,94.01 44.2,93.02 44.2,91.87 v1(43.56,91.24)
R5: length 83.1
  TOP w0.203: v1(62.61,92.89) 84.53,92.89 90.55,86.87 90.55,64.93 88.24,62.61 J2.30 ; v1(43.56,92.13) 42.86,91.43 42.86,90.92 42.01,90.07 J1.28
  BOTTOM w0.203: v1(43.56,92.13) 43.56,93.27 44.81,94.51 59.82,94.51 60.93,93.4 62.1,93.4 v1(62.61,92.89)
R6: length 84.7
  TOP w0.203: J1.29 41.51,90.46 v1(42.29,91.24) ; v1(61.72,93.9) 62.23,93.4 84.74,93.4 91.06,87.08 91.06,64.86 88.74,62.54 J2.29
  BOTTOM w0.203: v1(61.72,93.9) 60.71,94.92 44.45,94.92 42.93,93.4 42.93,91.87 v1(42.29,91.24)
R7: length 86.4
  TOP w0.203: v1(62.61,93.9) 84.95,93.9 91.57,87.29 91.57,64.79 89.24,62.46 J2.28 ; v1(42.29,92.13) 41.01,90.85 J1.30
  BOTTOM w0.203: v1(42.29,92.13) 42.29,93.52 44.2,95.43 61.09,95.43 v1(62.61,93.9)
RST: length 48.4
  TOP w0.203: R10.1 65.4,60.45 62.36,63.49 v1(62.36,79.24) ; J1.33 39.51,86.59 40.51,85.59 v1(42.8,85.59)
  BOTTOM w0.203: v1(42.8,85.59) 43.56,84.83 56.77,84.83 v1(62.36,79.24)
TP_INT: length 47.4
  TOP w0.203: R26.1 33.87,78.52 33.4,78.99 27.47,78.99 22.92,83.53 22.92,93.88 25.75,96.71 34.28,96.71 38.51,92.47 J1.35
TP_RST: length 46.9
  TOP w0.203: R25.1 35.36,78.55 34.42,79.5 27.54,79.5 23.33,83.7 23.33,93.71 25.92,96.3 33.79,96.3 38.01,92.09 J1.36
TP_SCL: length 46.4
  TOP w0.203: R24.1 36.87,78.57 35.43,80 27.6,80 23.74,83.87 23.74,93.54 26.09,95.9 33.44,95.9 37.51,91.82 J1.37
TP_SDA: length 48.4
  TOP w0.203: R23.1 38.61,80.51 27.67,80.51 24.14,84.04 24.14,93.38 26.26,95.49 33.08,95.49 37.01,91.56 J1.38
VGH: length 15.2
  TOP w0.254: J2.41 82.74,62.79 83.02,63.08
  TOP w0.508: R2.2 83.27,63.33 83.02,63.08
  TOP w1.016: R2.2 C4.2 83.27,67.14 83.57,67.43 C3.1 C2.1 83.57,71.75 83.26,72.05 D2.2 83.26,75.03 R1.1
VGL: length 15.2
  TOP w0.254: J2.42 82.24,62.67 81.91,62.99
  TOP w0.508: 81.91,62.99 81.57,63.33 R6.2
  TOP w1.016: R5.1 81.58,75.05 D4.1 81.58,72.05 81.28,71.75 C8.1 C9.1 81.28,67.43 81.57,67.14 C10.2 R6.2
VLED+: length 10.4
  TOP w0.254: J2.2 102.24,62.74 102.49,62.99 ; J2.1 102.74,63.24
  TOP w1.016: 102.49,62.99 103.24,63.74 C24.2 104.86,64.73 C21.1 105.69,65.25 D6.2
VLED-: length 22.5
  TOP w0.254: 101.24,60.43 101.47,60.19 101.74,60.46 ; 101.24,60.43 J2.4 ; 101.24,60.43 101.24,60.19 ; J2.3 101.74,60.46 ; 101.74,60.46 101.74,60.2
  TOP w0.508: R30.2 109.1,61.53 U3.3
  TOP w1.016: 101.47,60.19 101.47,56.89 103,55.37 106.05,55.37 107.43,56.75 R31.2 R30.2
VS: length 128.2
  TOP w0.203: J1.41 35.51,90.78 32.5,93.79 27.06,93.79 26.05,92.78 26.05,84.87 28.54,82.38 40.45,82.38 45.35,77.48 45.35,58.41 56.26,47.49 86.64,47.49 98.24,59.09 J2.10
N16662620: length 7.2
  TOP w0.508: U3.1 111.01,66.94 L2.2
  TOP w1.016: L2.2 109.09,68.85 D6.1
N16662628: length 18
  TOP w0.203: J2.47 79.74,57.51 77.34,55.11 69.98,55.11 68.47,56.62 R19.1
N16662982: length 3.7
  TOP w0.508: U3.4 115.71,61.53 R28.2 R29.2
N16663078: length 34.3
  TOP w0.254: 80.1,62.74 80.24,62.61 J2.46 80.24,60.6 80.26,60.57 v1(80.26,60.45) ; v1(100.2,60.45) 100.24,60.48 J2.6 100.24,62.58 101.74,64.08 C16.1
  TOP w0.508: R15.1 R18.2 C17.1 78.12,63.74 78.63,63.23 79.62,63.23 80.1,62.74
  BOTTOM w0.508: v1(80.26,60.45) 81.03,59.68 99.44,59.68 v1(100.2,60.45)
N16663526: length 5.7
  TOP w0.203: R23.2 R22.2 37.66,73.9 37.66,73.89 37.42,73.65 J3.1
N16663546: length 5.2
  TOP w0.203: J3.2 36.92,74.69 R20.2 R24.2
N16663566: length 3.6
  TOP w0.203: J3.3 36.42,75.06 R25.2
N16663598: length 4
  TOP w0.203: R26.2 35.92,74.08 J3.4
N16663626: length 4.9
  TOP w0.254: J2.8 99.24,62.58 98.67,63.15 R3.2 R4.1
N16663658: length 28.8
  TOP w0.203: J2.40 83.24,59.48 77.85,54.1 64.9,54.1 62.34,56.65 R8.2 60.88,57.61 R17.1
N16663662: length 32.9
  TOP w0.203: J2.39 83.74,59.28 78.05,53.59 62.36,53.59 59.32,56.63 R16.1 R7.2
N16663942: length 24
  TOP w0.203: R9.2 R10.2 65.43,57.61 C18.2 66.92,56.65 68.96,54.6 77.6,54.6 81.24,58.24 J2.44
N16663986: length 33.7
  TOP w0.508: U1.1 68.53,76.8 L1.2
  TOP w1.016: C6.1 82.41,84.06 82.42,84.07 v1(82.8,84.07) 82.82,84.06 C5.1 ; L1.2 67.92,76.73 66.91,75.71 D5.1 v1(65.41,74.16)
  BOTTOM w1.016: v1(65.41,74.16) v1(68.2,74.16) 78.11,84.07 v1(81.79,84.07) v1(82.8,84.07)
N16664260: length 6
  TOP w1.016: R14.2 R13.1 C11.2 R11.1 R14.2
N16664552: length 2.4
  TOP w0.508: R13.2 74.05,76.78 U1.3
N16664760: length 2.5
  TOP w1.016: D3.3 79.08,82.67 C6.2
N16664764: length 2.5
  TOP w1.016: C5.2 85.76,82.67 D1.3
N16664892: length 3.8
  TOP w1.016: R1.2 C1.2 85.91,77.86 D1.2
N16665094: length 3.8
  TOP w1.016: R5.2 C7.2 78.93,77.88 D3.1
N16692155: length 2.3
  TOP w0.508: U1.4 74.03,81.59 R12.1

## Copper pours and planes (outline as drawn; the poured copper is in the pictures)
5V on TOP: 113.41,62.99 114.43,62.99 114.94,63.49 114.94,64.38 115.32,64.76 121.03,64.76 122.55,64.76 122.68,64.89 122.68,66.74 122.49,66.92 115.57,66.92 115.19,67.3 115.19,68.7 114.81,69.08 113.28,69.08 112.9,68.7 112.9,63.49
5V on TOP: 69.47,86.35 70.23,85.59 70.23,82.8 69.85,82.42 69.85,80.89 69.47,80.51 66.42,80.51 66.29,80.39 66.29,79.12 66.55,78.86 72.39,78.86 72.77,79.24 72.77,85.59 73.41,86.23 72.9,86.74 69.85,86.74
GND_POWER on TOP: 2.03,0.76 1.13,1.13 0.76,2.03 0.76,97.97 1.13,98.87 2.03,99.24 177.97,99.24 178.87,98.87 179.24,97.97 179.24,2.03 178.87,1.13 177.97,0.76 ; 22 cut-outs
GND_POWER on BOTTOM: 2.03,0.76 1.13,1.13 0.76,2.03 0.76,97.97 1.13,98.87 2.03,99.24 177.97,99.24 178.87,98.87 179.24,97.97 179.24,2.03 178.87,1.13 177.97,0.76 ; 3 cut-outs
VLED- on TOP: 107.06,62.1 107.06,56.51 110.74,56.51 111.38,57.14 111.38,61.84 109.86,61.84 109.6,62.1
N16662620 on TOP: 107.19,69.72 111.25,69.72 111.89,69.08 111.89,63.49 111.51,63.11 110.49,63.11 110.11,63.49 110.11,66.29 108.46,67.94 107.19,67.94 106.93,68.19 106.93,69.46
N16663986 on TOP: 72.26,77.46 65.66,77.46 64.64,76.45 64.64,74.04 65.53,73.15 67.82,73.15 68.83,74.16 68.83,75.05 69.47,75.69 72.01,75.69 72.52,76.19 72.52,77.21

## Text on the board
Ref Des/Silkscreen Bottom: www.100ask.net
User.Comments: CR_MK_1
Ref Des/Silkscreen Top: 100ASK-7"RGB LCD-V1.1
DEVICE_TYPE_BOTTOM: 50 | 1 | 6 | 100 | 91.69 | 4.155 | 3.765 | 172.47 | 180
User.12: FIGURE | SIZE | 10.0 | DRILL CHART: TOP to BOTTOM | ALL UNITS ARE IN MILS | PLATED | QTY | 352
